# Altium PCB PCB_2021-06-03.pcbdoc
Units mil, origin at the board's own origin, x right, y up, seen from the top; angles counter-clockwise.
Board outline 3817.5 x 3390 mil, 2 copper layers (Top Layer, Bottom Layer); 39 components, 40 nets, 140 pads, 39 vias.
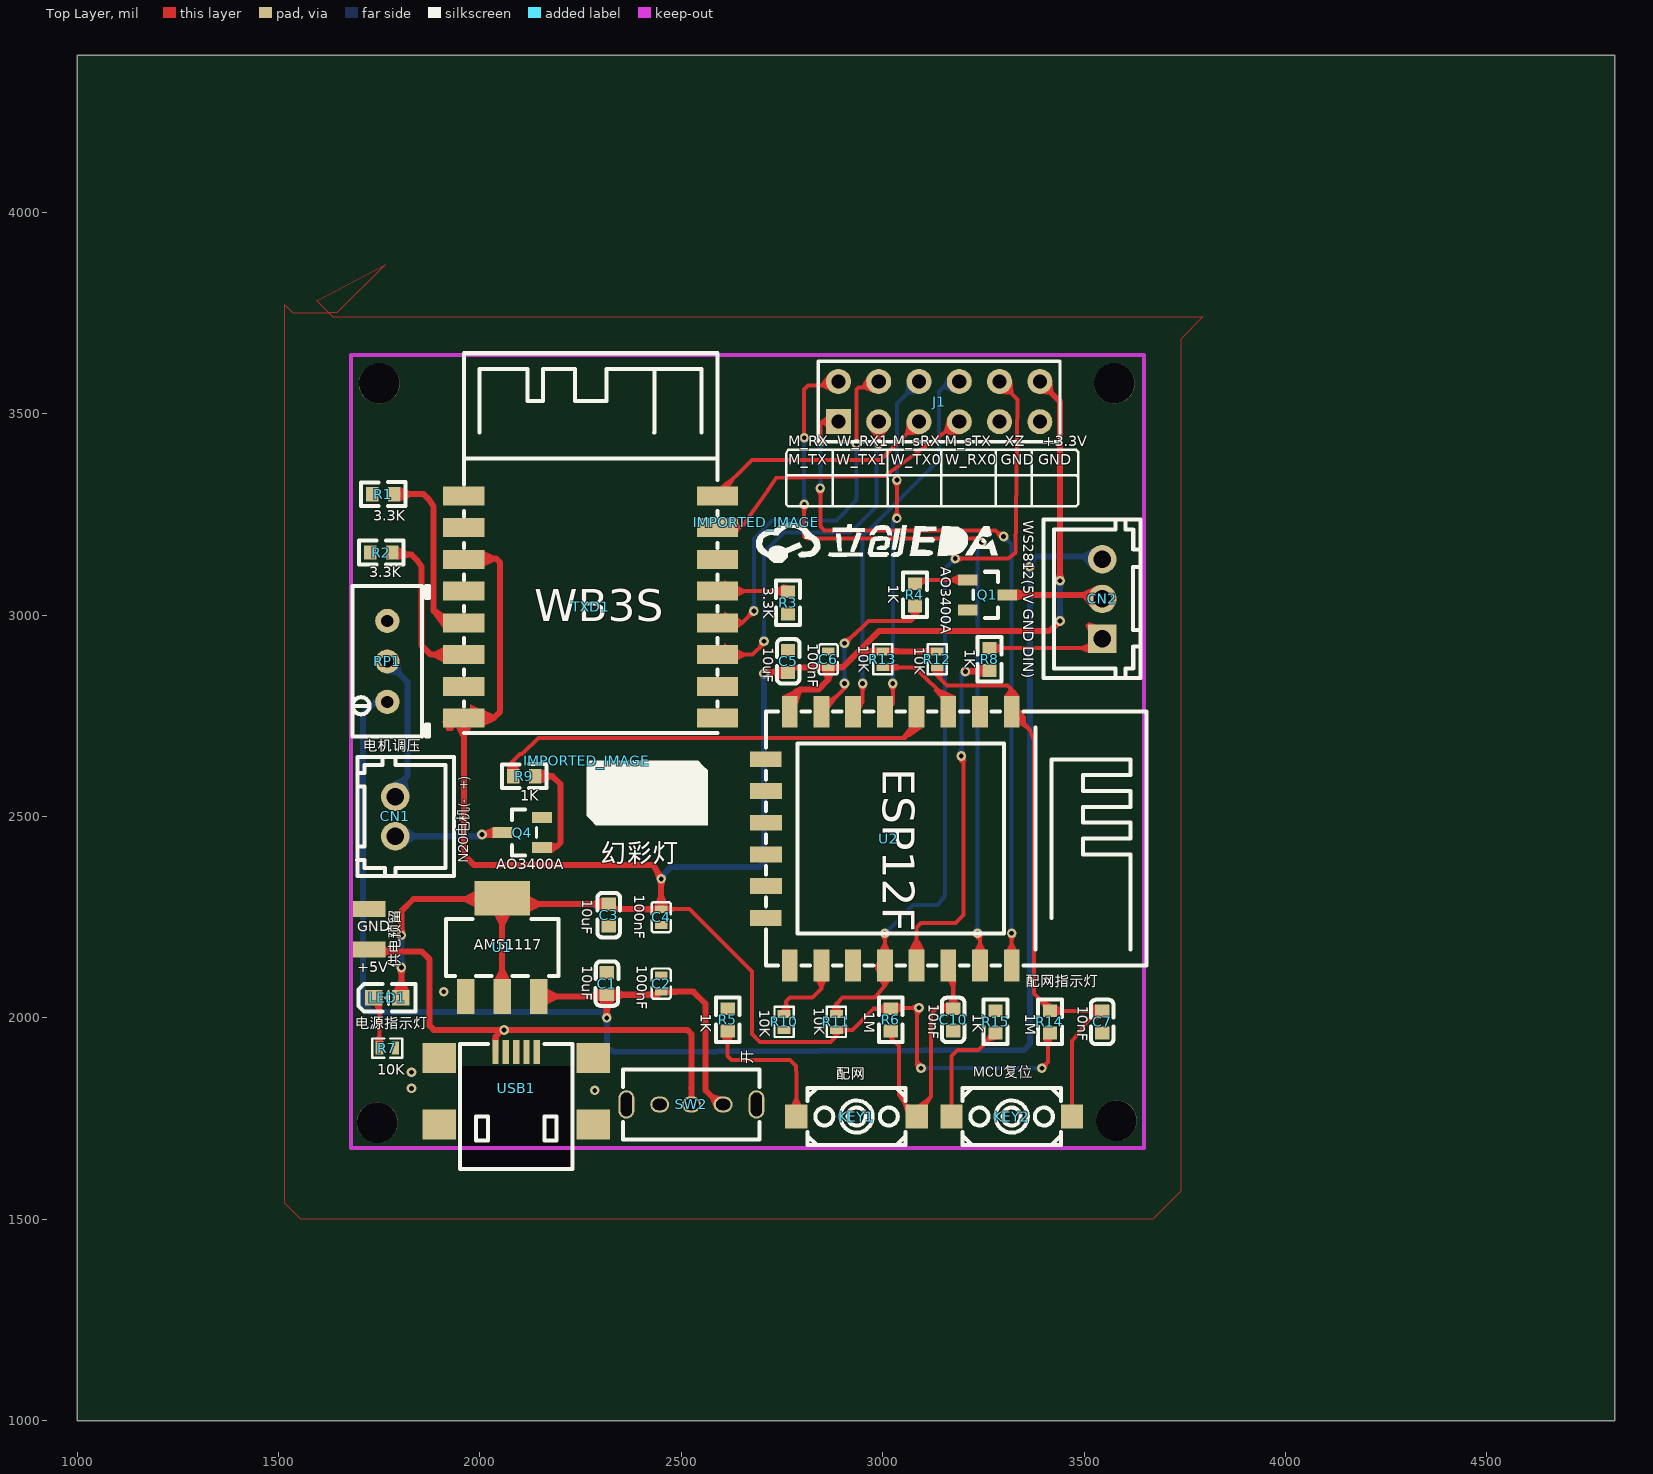
[diagram p0: Top Layer view]
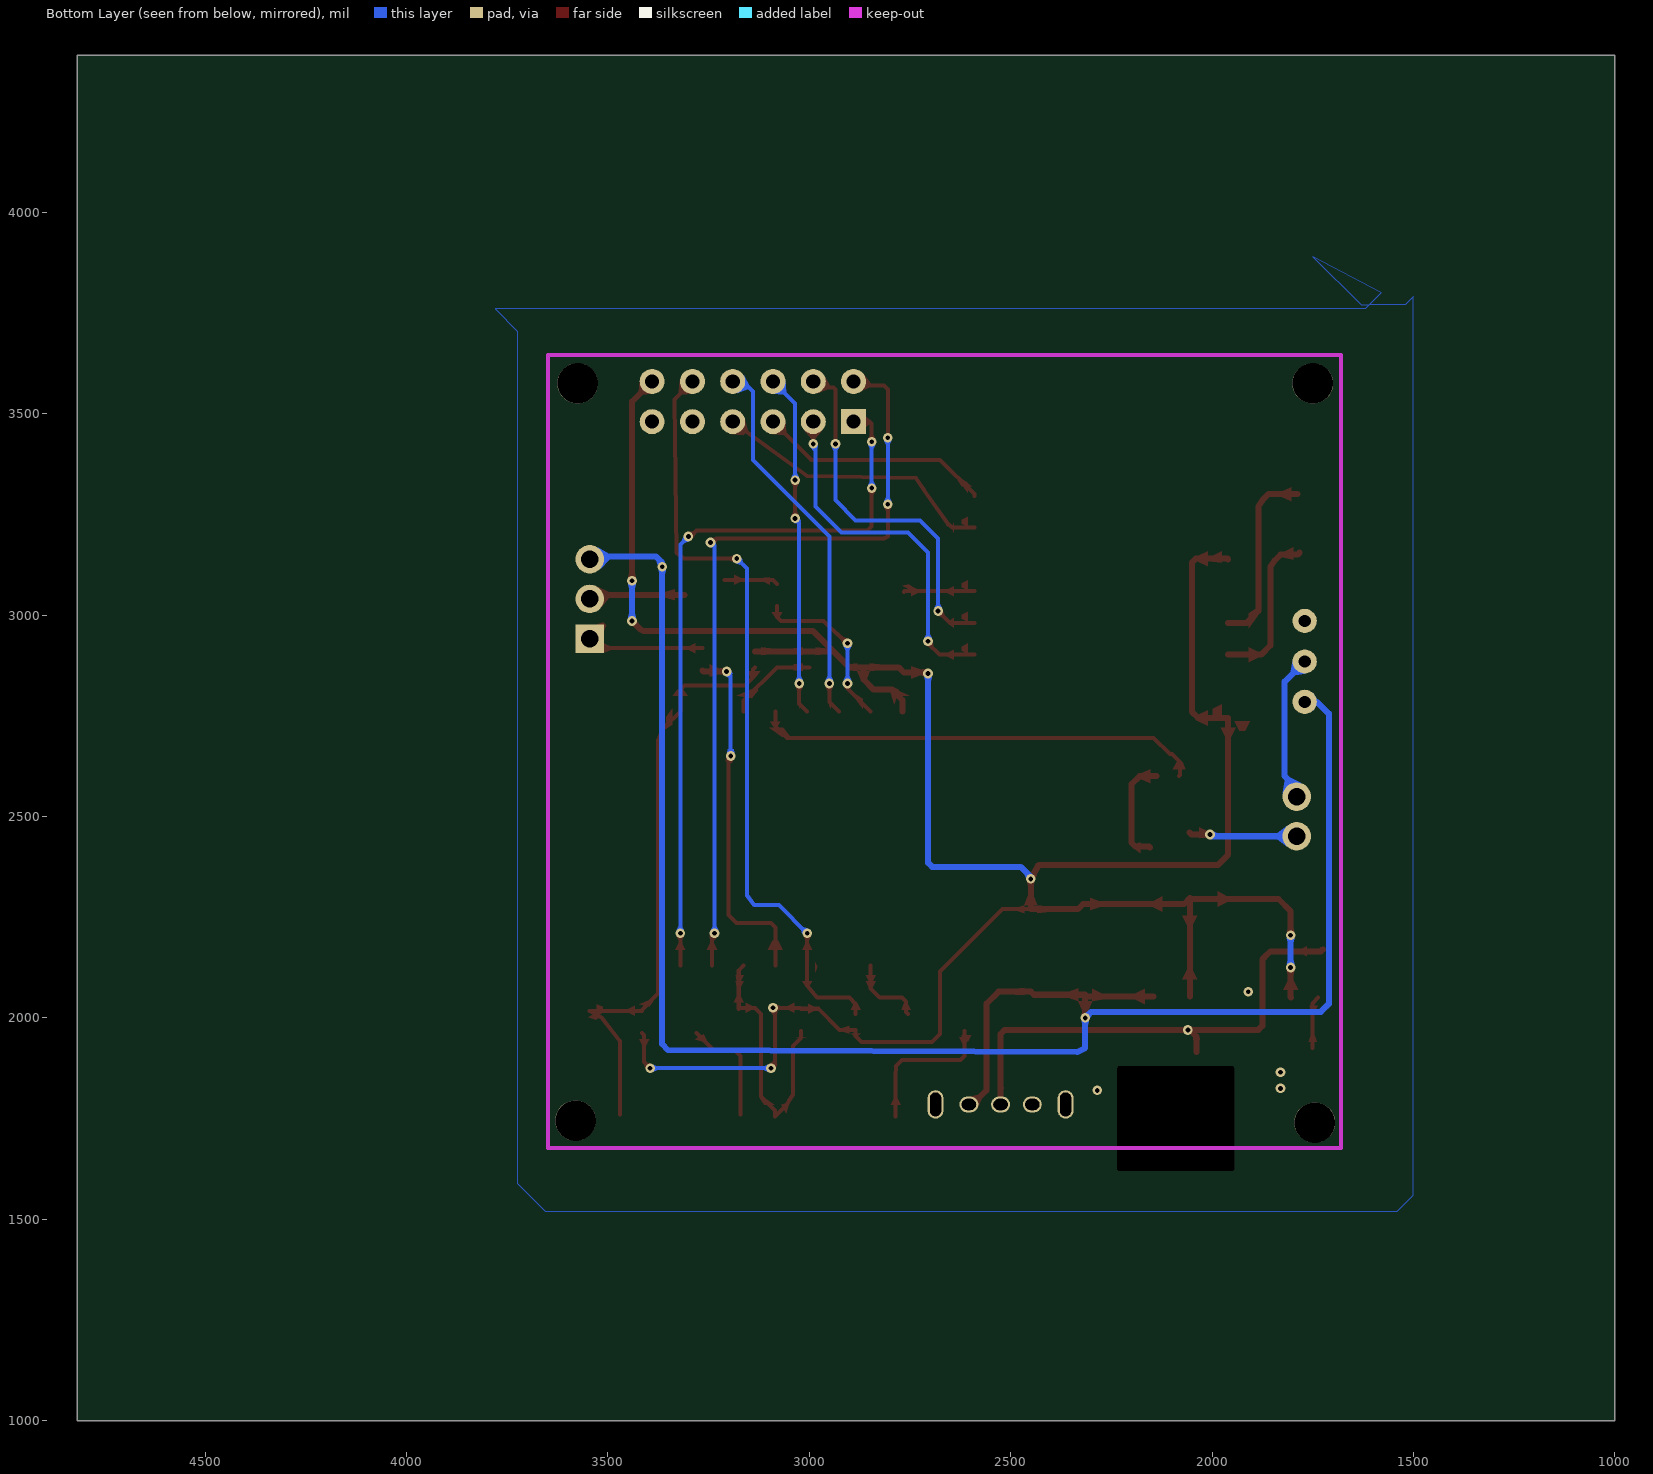
[diagram p1: Bottom Layer view, seen from below]

## Layer stack, top to bottom
Top Layer: signal copper (thickness not stored)
Dielectric: dielectric 12.6, FR-4, Dk 4.8
Bottom Layer: signal copper (thickness not stored)

## Board outline
4817.5,1000 1000,1000 1000,4390 4817.5,4390

## Components (designator, comment, footprint, x,y, rotation, side; value= is the part's Value field where it differs from the comment)
C1 "10uF" C0603 2315,2085 r270 top
C2 "100nF" C0402 2450,2085 r270 top
C3 "10uF" C0603 2320,2255 r90 top
C4 "100nF" C0402 2450,2250 r90 top
C5 "10uF" C0603 2765,2885 r270 top
C6 "100nF" C0402 2865,2890 r270 top
C7 "10nF" C0603 3545,1990 r90 top
C10 "10nF" C0603 3175,1995 r90 top
CN1 "HX25003-2A" CONN-TH_2P-P2.50_HX25003-2A 1790,2500 r90 top
CN2 "HX25003-3A" CONN-TH_3P-P2.50_HX25003-3A 3545,3040 r270 top
IMPORTED_IMAGE "IMPORTED_IMAGE" IMPORTED_IMAGE 2265,2638.1 r0 top
IMPORTED_IMAGE "IMPORTED_IMAGE" IMPORTED_IMAGE 2685.34,3230 r0 top
J1 "HDR-M-2.54_2x6" HDR-M-2.54_2X6 3140,3530 r0 top
KEY1 "配网" KEY-SMD_2P-L6.2-W3.6-LS8.0 2935,1755 r0 top
KEY2 "MCU复位" KEY-SMD_2P-L6.2-W3.6-LS8.0 3320,1755 r0 top
LED1 "电源指示灯" LED0603-R-RD 1770,2050 r0 top
Q1 "AO3400A" SOT-23-3_L2.9-W1.3-P1.90-LS2.4-BR 3260,3050 r180 top
Q4 "AO3400A" SOT-23-3_L2.9-W1.3-P1.90-LS2.4-BR 2105,2460 r0 top
R1 "3.3K" R0603 1760,3300 r0 top
R2 "3.3K" R0603 1755,3155 r0 top
R3 "3.3K" R0603 2765,3030 r90 top
R4 "1K" R0603 3080,3050 r90 top
R5 "1K" R0603 2615,1995 r270 top
R6 "1M" R0603 3020,1995 r90 top
R7 "10K" R0402 1770,1925 r180 top
R8 "1K" R0603 3265,2890 r90 top
R9 "1K" R0603 2110,2600 r0 top
R10 "10K" R0402 2755,1990 r270 top
R11 "10K" R0402 2885,1990 r270 top
R12 "10K" R0402 3135,2890 r270 top
R13 "10K" R0402 3000,2890 r270 top
R14 "1M" R0603 3415,1990 r270 top
R15 "1K" R0603 3280,1990 r270 top
RP1 "R_3296W_US" RES-ADJ-TH_3296W 1770,2885 r180 top
SW2 "开" SW-TH_SK-12D02VG3 2525,1785 r0 top
TXD1 "WB3S" WB3S 2275,3020 r0 top
U1 "AMS1117" SOT-223-3_L6.5-W3.4-P2.30-LS7.0-BR 2055,2175 r270 top
U2 "ESP-12F(ESP8266MOD)" WIFIM-SMD_ESP-12F-ESP8266MOD 3015,2445 r270 top
USB1 "U253-051T-4BH87-F-2" MICRO-USB-SMD_U253-051T-4BH87-S-2 2090,1825 r0 top

## Footprints (in the part's own frame and the unit in brackets; to place one, negate y for a bottom-side part, rotate by r counter-clockwise, add the part's x,y. Pads: shape width x height; smd on the part's side, far side on the other; paste and mask are expansions set on the pad)
C0402 [mm]
  rect 0.5x0.8 smd: 1(-0.5,0) 2(0.5,0)
  silkscreen extent -0.95,-0.6 0.95,0.6
C0603 [mm]
  rect 0.8x0.9 smd: 1(-0.7,0) 2(0.7,0)
  silkscreen extent -1.4,-0.7 1.4,0.72
CONN-TH_2P-P2.50_HX25003-2A [mm]
  round 1.8 hole 1.1: 1(-1.25,0) 2(1.25,0)
  silkscreen extent -3.75,-3.7 3.75,2.41
CONN-TH_3P-P2.50_HX25003-3A [mm]
  rect 1.8x1.8 hole 1.1: 1(2.5,0)
  round 1.8 hole 1.1: 2(0,0) 3(-2.5,0)
  silkscreen extent -5,-3.7 5,2.4
HDR-M-2.54_2X6 [mil]
  rect 62x62 hole 35: 1(-250,-50)
  round 62 hole 35: 2(-250,50) 3(-150,-50) 4(-150,50) 5(-50,-50) 6(-50,50) 7(50,-50) 8(50,50) 9(150,-50) 10(150,50) 11(250,-50) 12(250,50)
  silkscreen extent -300,-100 300,100
IMPORTED_IMAGE [mil]
  silkscreen extent 0,-160 300,0
KEY-SMD_2P-L6.2-W3.6-LS8.0 [mm]
  rect 1.4x1.5 smd: 1(-3.8,0) 2(3.8,0)
  silkscreen extent -3.1,-1.8 3.1,1.8
LED0603-R-RD [mil]
  rect 43x39 smd: 1(33.5,0) 2(-33.5,0)
  silkscreen extent -72,-34 70,34
MICRO-USB-SMD_U253-051T-4BH87-S-2 [mm]
  rect 0.4x1.524 smd: 1(-1.3,2.288) 2(-0.65,2.288) 3(0,2.288) 4(0.65,2.288) 5(1.3,2.288)
  rect 2.1x1.9 smd: 6(4.85,1.913) 7(4.85,-2.288) 8(-4.85,-2.288) 9(-4.85,1.913)
  Multi-Layer board cut-out: -3.683,-5.08 -3.683,1.27 -3.673,1.319 -3.646,1.36 -3.605,1.387 -3.556,1.397 -3.556,1.397 3.556,1.397 3.605,1.387 3.646,1.36 3.673,1.319 3.683,1.27 3.683,1.27 3.683,-5.08 3.673,-5.129 3.646,-5.17 3.605,-5.197 3.556,-5.207 3.556,-5.207 -3.556,-5.207 -3.605,-5.197 -3.646,-5.17 -3.673,-5.129 -3.683,-5.08 -3.683,-5.08
  silkscreen extent -3.56,-5.08 3.56,2.8
R0402 [mm]
  rect 0.5x0.8 smd: 1(-0.5,0) 2(0.5,0)
  silkscreen extent -0.95,-0.6 0.95,0.6
R0603 [mm]
  rect 0.8x0.9 smd: 1(-0.7,0) 2(0.7,0)
  silkscreen extent -1.4,-0.75 1.4,0.76
RES-ADJ-TH_3296W [mil]
  round 60 hole 30: 1(0,100.39) 2(0,0.39) 3(0,-100.39)
  silkscreen extent -104,-187 87,187
SOT-23-3_L2.9-W1.3-P1.90-LS2.4-BR [mm]
  rect 1.25x0.7 smd: 1(1.25,-0.95) 2(1.25,0.95) 3(-1.25,0)
  silkscreen extent -0.65,-1.46 0.9,1.46
SOT-223-3_L6.5-W3.4-P2.30-LS7.0-BR [mm]
  rect 2.2x1.1 smd: 1(3.099,-2.3) 2(3.099,0) 3(3.099,2.3)
  rect 2.2x3.5 smd: 4(-3.099,0)
  silkscreen extent -1.8,-3.55 1.8,3.55
SW-TH_SK-12D02VG3 [mm]
  oval 1.2x1 hole 0.7 slot 0.9 at 0 deg: 1(-2,0) 2(0,0) 3(2,0)
  oval 1x1.8 hole 0.7 slot 1.5 at 90 deg: 4(4.1,0) 5(-4.1,0)
  silkscreen extent -4.3,-2.2 4.3,2.2
WB3S [mm]
  rect 2.6x1.2 smd: 1(-8,7) 2(-8,5) 3(-8,3) 4(-8,1) 5(-8,-1) 6(-8,-3) 7(-8,-5) 8(-8,-7) 9(8,-7) 10(8,-5) 11(8,-3) 12(8,-1) 13(8,1) 14(8,3) 15(8,5) 16(8,7)
  silkscreen extent -8,-7.95 8,16
WIFIM-SMD_ESP-12F-ESP8266MOD [mm]
  rect 2x1 smd: 1(-8.002,7.751) 2(-8.002,5.751) 3(-8.002,3.751) 4(-8.002,1.751) 5(-8.002,-0.25) 6(-8.002,-2.25) 7(-8.002,-4.249) 8(-8.001,-6.249) 9(7.999,-6.249) 10(8,-4.249) 11(8.002,-2.25) 12(8.001,-0.25) 13(8,1.751) 14(8.001,3.751) 15(8,5.751) 16(8.001,7.751)
  rect 1x2 smd: 17(-5,-7.751) 18(-3.002,-7.749) 19(-1.003,-7.749) 20(0.998,-7.749) 21(2.997,-7.749) 22(4.997,-7.75)
  silkscreen extent -8,-7.75 8,16.25

## Free pads (board coordinates)
  rect 80x40 smd: 1(1725,2170) 2(1725,2270)
  round 100.39 hole 100.39 unplated: ""(1745,1740) ""(1750,3575) ""(3575,3575) ""(3580,1745)

## Via types
v1: diameter 24, hole 12, Top Layer to Bottom Layer, 39 vias

## Nets (pads, with @x,y where several pads share a name; then routed paths per layer and width w, separated by ;. In a path a pad name is that pad's centre, name@x,y a point inside that pad or via, vN(x,y) a via of type N, cw(c..) or ccw(c..) an arc to the next point about the centre after c; other vN are vias at no path point)
+3.3V: C3.2 C4.2 C5.2 C6.2 J1.12 LED1.1 R6.2 R11.2 R12.1 R13.1 R14.2 TXD1.3 TXD1.8 U1.2 U1.4 U2.8 | length 6612
  Top Layer w10: C4.2 2520,2270 2675,2115 2675,1960 2695,1940 2870,1940 2885,1955 R11.2 2925.3,1970.3 2977.6,2022.6 R6.2 3022.4,2025 v1(3090,2025) 3085,2025 3085,1885 v1(3095,1875) ; v1(3395,1875) 3410,1890 3410,1957.44 R14.2
  Top Layer w15: LED1.1 1805,2051.5 v1(1805,2125) ; v1(1805,2205) 1805,2265 1835,2295 2053,2295 U1.4 ; TXD1.3 1961.9,3140 2040,3140 2050,3130 2050,2760 2034.4,2744.4 TXD1.8 1960,2405 1985,2380 2430,2380 v1(2450,2345) C4.2 2332.9,2269.7 C3.2 2069.4,2282.6 U1.4 ; U1.2 U1.4 ; v1(2705,2855) 2707.4,2857.4 C5.2 2777.9,2870.3 C6.2 ; U2.8 2769,2789 2795,2815 2840,2815 2865,2840 C6.2 ; R12.1 R13.1 2940,2909.7 ; J1.12 3440,3530 v1(3440,3085) ; v1(3440,2985) 3425,2970 3420,2965 3410,2960 2990.3,2960 2940,2909.7 ; C6.2 2900.3,2870.3 2940,2909.7
  Bottom Layer w10: v1(3095,1875) v1(3395,1875)
  Bottom Layer w15: v1(1805,2125) v1(1805,2205) ; v1(2450,2345) 2450,2350 2475,2375 2695,2375 2705,2385 v1(2705,2855) ; v1(3440,2985) v1(3440,3085)
+5V: C1.2 C2.2 CN2.3 RP1.1 SW2.3 U1.3 | length 4692.3
  Top Layer w15: U1.3@2145.5,2053 2310.6,2053 C1.2 ; v1(2315,2000) C1.2 ; SW2.3 2595,1785 2560,1820 2560,2035 2529.7,2065.3 C2.2 2442.1,2057.4 C1.2
  Bottom Layer w15: RP1.1 1739.6,2784.6 1710,2755 1710,2040 1710,2035 1715,2030 1730,2015 2300,2015 v1(2315,2000) 2315,1925 2335,1915 3350.9,1920 3365,1935 v1(3365,3120) 3365,3130 3380,3145 3538.43,3145 CN2.3
DIN: R8.1 U2.13 | length 895.1
  Top Layer w10: U2.13 3083.9,2223.9 3095,2235 3180,2235 3200,2255 3200,2645 v1(3195,2650)
  Top Layer w15: v1(3205,2860) 3262.6,2860 R8.1
  Bottom Layer w10: v1(3195,2650) 3195,2850 v1(3205,2860)
GND: C1.1 C2.1 C3.1 C4.1 C5.1 C6.1 C7.1 C10.1 J1.9 J1.11 pad.2 Q1.2 Q4.2 R1.1 R2.1 R3.1 R5.1 R7.1 R10.2 R15.1 SW2.4 SW2.5 TXD1.9 U1.1 U2.9 USB1.5 USB1.6 USB1.7 USB1.8 USB1.9
  other v1: 2285,1820 1830,1825 1830,1865 1910,2065
KEY2_1: KEY2.1 R15.2 | length 278.5
  Top Layer w10: KEY2.1@3170.4,1760 3170.4,1905 3185,1920 3237.6,1920 R15.2
LED: R4.1 U2.7 | length 421.7
  Top Layer w10: U2.7 2905,2817.3 v1(2905,2830) ; v1(2905,2930) 2950,2970 2955,2975 2965,2985 3070,2985 3080,2995 R4.1
  Bottom Layer w10: v1(2905,2830) v1(2905,2930)
M_RST: C7.2 KEY2.2 R12.2 R14.1 U2.1 | length 1474.8
  Top Layer w10: R12.2 3140,2865.3 3140,2845 3160,2825 3310,2825 3320.1,2814.9 U2.1 3360,2720.2 3365,2715 3375,2690 3375,2060 3415,2020 R14.1 C7.2 ; KEY2.2@3469.6,1760 3469.6,1942.2 3515,2000 C7.2
M_RX: J1.2 U2.15 | length 1960.4
  Top Layer w10: v1(2805,3275) 2805,3195 2815,3190 3230,3190 3240,3180 v1(3245,3180) ; v1(2805,3440) 2805,3560 2815,3570 2880,3570 J1.2 ; v1(3235,2210) 3241.4,2203.6 U2.15
  Bottom Layer w10: v1(2805,3275) v1(2805,3440) ; v1(3235,2210) 3235,3170 v1(3245,3180)
M_SRX: J1.6 U2.5 | length 855.1
  Top Layer w10: U2.5 3025,2779.8 v1(3025,2830) ; v1(3035,3240) v1(3035,3335)
  Bottom Layer w10: v1(3025,2830) 3025,3230 v1(3035,3240) ; v1(3035,3335) 3035,3525 J1.6
M_STX: J1.8 U2.6 | length 943.8
  Top Layer w10: U2.6 2950,2783.6 v1(2950,2830)
  Bottom Layer w10: v1(2950,2830) 2950,3195 3140,3385 3140,3555 3165,3580 J1.8
M_TX: J1.1 U2.16 | length 1840.7
  Top Layer w10: v1(2845,3315) 2845,3220 2855,3210 2860,3210 3280,3210 3295,3195 v1(3300,3195) ; v1(2845,3430) 2845,3475 2850,3480 J1.1 ; v1(3320,2210) U2.16
  Bottom Layer w10: v1(2845,3315) v1(2845,3430) ; v1(3300,3195) 3320,3175 v1(3320,2210)
N20: R9.1 U2.4 | length 1112.8
  Top Layer w10: R9.1 2080,2602.4 2080,2635 2100,2655 2105,2655 2145,2695 3055,2695 3083.9,2723.9 U2.4
PW: C10.2 KEY1.2 R6.1 U2.14 | length 681.5
  Top Layer w10: R6.1 3020,1950 3040,1930 3040,1810 3050,1795 3055,1784.6 KEY1.2 3084.6,1769.6 3120,1805 3120,2010 3135,2025 3172.6,2025 C10.2 3175,2117.7 U2.14
Q1_3: CN2.2 Q1.3 | length 239.9
  Top Layer w15: Q1.3 3535,3050 CN2.2
Q4_1: Q4.1 R9.2 | length 266.6
  Top Layer w15: R9.2 2180,2600 2200,2580 2200,2435 2190,2425 2156.6,2425 Q4.1
Q4_3: CN1.1 Q4.3 | length 269.6
  Top Layer w15: v1(2005,2455) 2050.8,2455 Q4.3
  Bottom Layer w15: CN1.1 2000.79,2450.79 v1(2005,2455)
R4_2: Q1.1 R4.2 | length 134.9
  Top Layer w10: R4.2 3089.8,3087.4 Q1.1
R5_2: KEY1.1 R5.2 | length 367.8
  Top Layer w10: R5.2 2615,1905 2625,1895 2770,1895 2785,1880 2785,1875 2785.4,1859.6 KEY1.1
R7_2: LED1.2 R7.2 | length 130.7
  Top Layer w10: LED1.2 1750.3,2036.2 R7.2
R8_2: CN2.1 R8.2 | length 289.9
  Top Layer w10: R8.2 3521,2917.6 CN2.1
RP1_2: CN1.2 RP1.2 | length 368.5
  Bottom Layer w15: RP1.2 1820,2834.61 1820,2600 1790,2570 CN1.2
S$68: 
S$2701: 
S$2703: 
S$2705: 
S$2707: 
S$2709: 
S$2711: 
S$2713: 
TXD1_5: R1.2 TXD1.5 | length 458.8
  Top Layer w15: R1.2 1860,3300 1875,3285 1885,3270 1885,3010 1914.4,2980.6 TXD1.5
TXD1_6: R2.2 TXD1.6 | length 398.3
  Top Layer w15: R2.2 1787.6,3150 1830,3150 1845,3135 1855,3120 1855,2925 1878.1,2901.9 TXD1.6
TXD1_13: R3.2 TXD1.13 | length 175.7
  Top Layer w10: TXD1.13 2763.2,3059.4 R3.2
U2_3: R13.2 U2.3 | length 224.3
  Top Layer w10: R13.2 3080,2870 3162.7,2787.3 U2.3
U2_10: R10.1 U2.10 | length 190.9
  Top Layer w10: R10.1 2760,2014.7 2760,2040 2770,2050 2825,2050 2847.7,2072.7 U2.10
USB1_1: pad.1 SW2.2 USB1.1 | length 1225.2
  Top Layer w15: pad.1 1730,2165 1855,2165 1870,2150 1875,2145 1875,2135 1875,1980 1885,1970 v1(2060,1970) ; USB1.1 2038.8,1953.8 2055,1970 2515,1970 2525,1960 SW2.2
W_RX0: J1.7 TXD1.15 | length 706.7
  Top Layer w10: TXD1.15@2590,3216.8 2643.2,3216.8 2655,3225 2715,3310 2735,3340 3005,3345 J1.7
W_RX1: J1.4 TXD1.12 | length 914.8
  Top Layer w10: TXD1.12 2650.6,2980.6 v1(2680,3010) ; v1(2935,3425) 2935,3560 2940,3565 2975,3565 J1.4
  Bottom Layer w10: v1(2680,3010) 2680,3190 2725,3235 2885,3235 2935,3285 v1(2935,3425)
W_TX0: J1.5 TXD1.16 | length 579
  Top Layer w10: TXD1.16 2590,3300 2675,3385 2995,3385 J1.5
W_TX1: J1.3 TXD1.11 | length 891.4
  Top Layer w10: TXD1.11 2676.8,2901.9 2705,2929.8 v1(2705,2935) ; v1(2990,3425) J1.3
  Bottom Layer w10: v1(2705,2935) 2705,3155 2755,3205 2920,3205 2985,3270 2985,3420 v1(2990,3425)
XZ: J1.10 R11.1 U2.12 | length 1931.2
  Top Layer w10: R11.1 2885,2035 2900,2050 2980,2050 3005,2080 U2.12 v1(3005,2210) ; v1(3180,3140) 3310,3140 3330,3155 3335,3535 J1.10
  Bottom Layer w10: v1(3005,2210) 3075,2280 3136.5,2280 3155,2305 3155,3115 v1(3180,3140)
pads on no net: RP1.3 SW2.1 TXD1.1 TXD1.2 TXD1.4 TXD1.7 TXD1.10 TXD1.14 U2.2 U2.11 U2.17 U2.18 U2.19 U2.20 U2.21 U2.22 USB1.2 USB1.3 USB1.4

## Polygon pours and split planes (outlines as drawn)
GND on Bottom Layer (solid): 1500,1560 1500,3790 1520,3770 1610,3770 1580,3800 1750,3890 1630,3770 1610,3770 1620,3760 3780,3760 3725,3705 3725,1590 3655,1520 1540,1520 1500,1560
GND on Top Layer (solid): 1515,1540 1515,3770 1535,3750 1625,3750 1595,3780 1765,3870 1645,3750 1625,3750 1635,3740 3795,3740 3740,3685 3740,1570 3670,1500 1555,1500 1515,1540

## Other copper
Top Layer:
  pour cut-out: 1935,3660 1935,3375 2615,3375 2615,3660
  pour cut-out: 1940,3660 1940,3375 2620,3375 2620,3660
  pour cut-out: 3379.44,2760.02 3379.44,2120.02 3654.44,2120.02 3654.44,2760.02
  region net USB1_1: 2030.94,1945.06 2046.69,1945.06 2046.3,1953.8 2031.3,1953.8
  region net M_RST: 3339.83,2752.83 3339.83,2727.83 3354.83,2718.26 3354.83,2732.4
  region net M_RST: 3397.29,2027.66 3421.64,2033.31 3398.69,2043.38 3387.21,2040.72
  region net M_RST: 3397.29,2027.66 3421.64,2033.31 3398.69,2043.38 3387.21,2040.72
  region net M_RST: 3339.8,2767.86 3339.8,2742.86 3354.8,2733.29 3354.8,2747.43
  region net M_RST: 3527.29,2005.06 3527.29,2030.06 3512.29,2022.56 3512.29,2012.56
  region net M_RST: 3432.71,2030.06 3432.71,2005.06 3447.71,2012.56 3447.71,2022.56
  region net +3.3V: 3422.5,1946.69 3397.5,1946.69 3405,1931.69 3415,1931.69
  region net +3.3V: 3406.98,1874.25 3394.25,1886.98 3403.02,1890.09 3410.09,1883.02
  region net M_RST: 3339.8,2752.85 3339.8,2727.85 3354.8,2718.32 3354.8,2732.45
  region net M_RST: 3527.29,2010.06 3527.29,2033.31 3512.29,2027.56 3512.29,2017.56
  region net +3.3V: 3406.98,1874.25 3394.25,1886.98 3403.02,1890.09 3410.09,1883.02
  region net R5_2: 2627.5,1951.69 2602.5,1951.69 2610,1936.69 2620,1936.69
  region net R5_2: 2772.9,1784.53 2797.9,1784.53 2790.4,1799.53 2780.4,1799.53
  region net R5_2: 2622.5,1956.7 2597.5,1956.7 2605,1941.7 2615,1941.7
  region net R5_2: 2772.9,1784.53 2797.9,1784.53 2790.4,1799.53 2780.4,1799.53
  region net M_RST: 3150.75,2860.47 3121.25,2860.47 3132.5,2845 3147.5,2845
  region net M_RST: 3301.39,2799.39 3338.89,2799.39 3327.64,2814.86 3312.64,2814.86
  region net U2_3: 3015.75,2880.16 3015.75,2860.47 3038.25,2862.67 3038.25,2877.67
  region net U2_3: 3142.98,2793.35 3179.99,2799.39 3144.25,2816.35 3126.01,2813.38
  region net N20: 2066.69,2617.72 2098.19,2617.72 2087.5,2635 2072.5,2635
  region net N20: 3099.4,2720.65 3064.24,2720.65 3047.54,2698.15 3068.76,2698.15
  region net M_SRX: 3016,2822.06 3034,2822.06 3030,2813.66 3020,2813.66
  region net M_SRX: 3021.46,2783.38 3024.87,2773.17 3024.87,2792.21 3025,2772.77 3024.87,2773.17 3024.87,2767.21 3021.46,2783.38
  region net M_STX: 2941,2822.06 2959,2822.06 2955,2813.66 2945,2813.66
  region net M_STX: 2946.13,2792.21 2946.13,2767.21 2950,2776.51 2946.46,2787.12
  region net LED: 2896,2822.06 2914,2822.06 2910,2817.32 2900,2817.32
  region net LED: 2867.39,2792.21 2867.39,2767.21 2882.39,2787.64 2882.39,2801.78
  region net +3.3V: 2880.75,2860.47 2849.25,2860.47 2857.5,2840 2872.5,2840
  region net +3.3V: 2751.23,2799.36 2788.65,2796.88 2800.3,2809.7 2785.05,2815.66
  region net U2_10: 2747.5,2019.53 2770.75,2019.53 2765,2034.53 2755,2034.53
  region net U2_10: 2860.2,2090.66 2835.2,2090.66 2842.7,2075.66 2852.7,2075.66
  region net XZ: 3017.54,2090.64 2992.54,2090.64 3000,2080.02 3010,2080
  region net XZ: 2872.5,2019.53 2897.5,2019.53 2890,2034.53 2880,2034.53
  region net XZ: 2996,2202.06 3014,2202.06 3010,2193.66 3000,2193.66
  region net XZ: 2992.5,2169.38 3017.5,2169.38 3010,2184.38 3000,2184.38
  region net DIN: 3188.86,2639.69 3206,2645.2 3207.5,2636.86 3192.5,2632.04
  region net DIN: 3065.17,2169.41 3102.67,2169.41 3091.42,2191.91 3076.42,2191.91
  region net PW: 3162.5,2038.31 3187.5,2038.31 3180,2053.31 3170,2053.31
  region net PW: 3182.35,2090.64 3162.5,2090.64 3170,2075.64 3180,2075.64
  region net M_RX: 3228.9,2169.39 3253.9,2169.39 3246.4,2184.39 3236.4,2184.39
  region net M_RX: 3229.83,2199.17 3246.39,2206.22 3246.4,2197.09 3236.4,2192.84
  region net M_TX: 3307.64,2169.38 3332.64,2169.38 3325.14,2184.38 3315.14,2184.38
  region net M_TX: 3329.07,2202.14 3311.07,2201.99 3315.14,2193.62 3325.14,2193.71
  region net M_RST: 3307.64,2814.4 3332.64,2814.4 3325.14,2814.86 3315.14,2814.86
  region net M_RST: 3150.7,2860.5 3127.5,2860.5 3135,2845.5 3145,2845.5
  region net U2_3: 3143,2794.5 3143,2814.4 3128,2829.07 3128,2814.93
  region net U2_3: 3015.75,2880.16 3015.75,2860.47 3030.75,2865.2 3030.75,2875.2
  region net N20: 3096.42,2735.6 3071.42,2735.6 3078.92,2723.92 3088.92,2723.92
  region net N20: 2067.5,2617.72 2092.5,2617.72 2085,2632.72 2075,2632.72
  region net M_SRX: 3016,2822.06 3034,2822.06 3030,2813.66 3020,2813.66
  region net M_SRX: 3021.46,2798.37 3024.9,2788.06 3024.9,2807.24 3025,2787.77 3024.9,2788.06 3024.9,2782.24 3021.46,2798.37
  region net M_STX: 2941,2822.06 2959,2822.06 2955,2813.66 2945,2813.66
  region net M_STX: 2946.1,2807.18 2946.1,2782.18 2950,2791.51 2946.46,2802.11
  region net +3.3V: 2880.75,2860.47 2849.25,2860.47 2857.5,2840 2872.5,2840
  region net +3.3V: 2778.06,2814.4 2788.6,2778.41 2797.4,2806.8 2789.7,2820.3
  region net U2_10: 2860.2,2105.7 2835.2,2105.7 2842.7,2090.7 2852.7,2090.7
  region net U2_10: 2747.5,2019.53 2770.75,2019.53 2765,2034.53 2755,2034.53
  region net XZ: 2985.5,2112.83 2985.5,2137.83 2980,2126.9 2983.54,2116.29
  region net XZ: 2872.5,2019.53 2897.5,2019.53 2890,2034.53 2880,2034.53
  region net XZ: 3014.09,2202.16 2996.09,2201.96 3000.18,2193.61 3010.18,2193.72
  region net DIN: 3188.86,2639.69 3206,2645.2 3205,2636.05 3195,2632.84
  region net PW: 3182.3,2105.6 3162.5,2105.6 3170,2090.6 3180,2090.6
  region net PW: 3162.5,2038.31 3187.5,2038.31 3180,2053.31 3170,2053.31
  region net M_RX: 3229.83,2199.17 3246.39,2206.22 3246.4,2197.1 3236.4,2192.84
  region net M_TX: 3329.07,2202.14 3311.07,2201.99 3315.14,2193.62 3325.14,2193.71
  region net W_TX0: 3059.06,3481.94 3091.94,3449.06 3063.69,3446.62 3056.62,3453.69
  region net W_TX0: 2596.71,3319.21 2621.71,3319.21 2631.28,3334.21 2617.14,3334.21
  region net W_TX0: 2606.1,3328.6 2606.1,3303.6 2621.1,3324.03 2621.1,3338.17
  region net W_TX0: 3059.06,3481.94 3091.94,3449.06 3063.69,3446.62 3056.62,3453.69
  region net W_RX0: 3159.06,3481.94 3191.94,3449.06 3163.69,3446.62 3156.62,3453.69
  region net W_RX0: 2641.14,3229.35 2641.14,3204.35 2643.15,3211.85 2643.15,3221.85
  region net W_RX0: 2606.1,3244.35 2606.1,3219.35 2621.1,3226.85 2621.1,3236.85
  region net W_RX0: 3187.14,3449.13 3159.73,3486.69 3152.96,3459.16 3158.85,3451.08
  region net TXD1_13: 2641.14,3071.87 2641.14,3046.87 2656.14,3054.37 2656.14,3064.37
  region net TXD1_13: 2747.3,3046.87 2747.3,3071.87 2732.3,3064.37 2732.3,3054.37
  region net TXD1_13: 2606.1,3086.87 2606.1,3061.87 2621.1,3069.37 2621.1,3079.37
  region net TXD1_13: 2747.3,3060.99 2769.06,3073.3 2752.71,3076.92 2744.66,3070.83
  region net W_RX1: 2641.14,2993.13 2641.14,2968.13 2650.62,2975.63 2650.62,2985.63
  region net W_RX1: 2680.75,2998.02 2668.02,3010.75 2664.91,3001.98 2671.98,2994.91
  region net W_RX1: 2606.1,3008.13 2606.1,2983.13 2621.1,2990.63 2621.1,3000.63
  region net W_RX1: 2680.75,2998.02 2668.02,3010.75 2664.91,3001.98 2671.98,2994.91
  region net W_TX1: 2693.15,2933.09 2708.38,2923.48 2700.62,2918.45 2691.94,2923.92
  region net W_TX1: 2641.14,2914.4 2641.14,2889.4 2656.14,2896.9 2656.14,2906.9
  region net W_TX1: 2606.1,2929.39 2606.1,2904.39 2621.1,2911.89 2621.1,2921.89
  region net W_TX1: 2693.16,2933.05 2708.41,2923.49 2700.67,2918.43 2691.98,2923.88
  region net +3.3V: 1978.75,2720.79 1941.25,2720.79 1952.5,2698.29 1967.5,2698.29
  region net +3.3V: 1943.79,2735.8 1906.29,2735.8 1917.54,2713.3 1932.54,2713.3
  region net +3.3V: 2438.25,2347.43 2453.88,2356.36 2448.41,2362.91 2435.38,2355.46
  region net TXD1_6: 1798.31,3168.75 1798.31,3137.28 1815,3142.5 1815,3157.5
  region net TXD1_6: 1908.86,2883.14 1908.86,2920.64 1886.36,2909.39 1886.36,2894.39
  region net TXD1_6: 1798.31,3168.75 1798.31,3137.28 1820.81,3142.5 1820.81,3157.5
  region net TXD1_5: 1803.31,3317.72 1803.31,3282.28 1825.81,3292.5 1825.81,3307.5
  region net TXD1_5: 1908.86,2967.39 1908.86,3004.25 1886.36,3019.25 1886.36,2998.04
  region net TXD1_5: 1803.31,3317.72 1803.31,3282.28 1825.81,3292.5 1825.81,3307.5
  region net +3.3V: 2011.22,3158.75 2011.22,3121.25 2033.72,3132.5 2033.72,3147.5
  region net +3.3V: 2011.22,2763.16 2011.22,2725.66 2033.72,2736.91 2033.72,2751.91
  region net +3.3V: 1976.2,3158.75 1976.2,3129.5 1998.7,3132.5 1998.7,3147.5
  region net +3.3V: 1976.2,2778.16 1976.2,2740.66 1998.7,2751.91 1998.7,2766.91
  region net +3.3V: 1976.2,3158.75 1976.2,3129.5 1998.7,3132.5 1998.7,3147.5
  region net +3.3V: 1976.2,2778.16 1976.2,2740.66 1998.7,2751.91 1998.7,2766.91
  region net DIN: 3212.94,2851 3212.94,2869 3221.34,2867.5 3221.34,2852.5
  region net DIN: 3247.29,2846.69 3247.29,2878.19 3224.79,2867.5 3224.79,2852.5
  region net R8_2: 3282.71,2930.06 3282.71,2905.06 3297.71,2912.56 3297.71,2922.56
  region net R8_2: 3509.57,2906.14 3509.57,2930.06 3494.57,2922.56 3494.57,2912.56
  region net R8_2: 3509.57,2959.34 3527.25,2977.01 3511.34,2982.31 3504.26,2975.24
  region net R7_2: 1758,2030.5 1737.82,2030.5 1745.32,2015.5 1755.32,2015.5
  region net R7_2: 1740.47,1940.75 1760.16,1940.75 1755.32,1955.75 1745.32,1955.75
  region net M_SRX: 3026,3247.94 3044,3247.94 3040,3256.34 3030,3256.34
  region net M_SRX: 3026,3327.06 3044,3327.06 3040,3318.66 3030,3318.66
  region net W_TX1: 3013.25,3459.5 2966.75,3459.5 2985,3437.8 2995,3437.8
  region net W_RX1: 2979.1,3550.98 2962.57,3594.44 2948.65,3570 2952.45,3560
  region net M_TX: 3298.14,3206.86 3288.47,3191.67 3283.47,3199.46 3288.97,3208.1
  region net M_TX: 2836,3307.06 2854,3307.06 2850,3298.66 2840,3298.66
  region net M_RX: 3243.14,3191.86 3233.47,3176.67 3228.47,3184.46 3233.97,3193.1
  region net M_RX: 2796,3267.06 2814,3267.06 2810,3258.66 2800,3258.66
  region net M_TX: 2836,3437.94 2854,3437.94 2850,3446.34 2840,3446.34
  region net M_TX: 2859,3467.5 2859,3492.5 2850,3485 2850,3475
  region net M_RX: 2875.59,3552.55 2864.57,3597.73 2847.78,3575 2850.22,3565
  region net XZ: 3187.94,3131 3187.94,3149 3196.34,3145 3196.34,3135
  region net XZ: 3288.06,3549.06 3320.94,3581.94 3323.38,3553.69 3316.31,3546.62
  region net LED: 3092.5,3006.69 3067.5,3006.69 3075,2995 3085,2995
  region net LED: 2916.98,2929.25 2904.25,2941.98 2913.02,2945.09 2920.09,2938.02
  region net +3.3V: 3440.75,2973.02 3428.02,2985.75 3423.14,2978.75 3433.75,2968.14
  region net +3.3V: 3431,3092.94 3449,3092.94 3447.5,3101.34 3432.5,3101.34
  region net +3.3V: 3388.06,3549.06 3420.94,3581.94 3423.38,3553.69 3416.31,3546.62
  region net R4_2: 3097.71,3093.31 3097.71,3074.9 3112.71,3082.4 3112.71,3092.4
  region net R4_2: 3186.2,3074.9 3186.2,3099.9 3171.2,3092.4 3171.2,3082.4
  region net Q4_1: 2153.31,2617.72 2153.31,2582.28 2175.81,2592.5 2175.81,2607.5
  region net Q4_1: 2178.81,2436.38 2178.81,2408.82 2190,2417.5 2190,2432.5
  region net +3.3V: 1796,2212.94 1814,2212.94 1812.5,2221.34 1797.5,2221.34
  region net +3.3V: 1986.1,2276.25 1986.1,2313.75 1963.6,2302.5 1963.6,2287.5
  region net +3.3V: 1786.25,2069.5 1823.75,2069.5 1812.5,2092 1797.5,2092
  region net +3.3V: 1796,2117.06 1814,2117.06 1812.5,2108.66 1797.5,2108.66
  region net USB1_1: 2052.06,1961 2052.06,1979 2043.66,1975 2043.66,1965
  region net USB1_1: 1765,2177.5 1765,2152.5 1780,2160 1780,2170
  region net +3.3V: 3097.26,1886.79 3083.02,1875.77 3080,1884.05 3090,1891.79
  region net +3.3V: 3096.14,2014.69 3079,2020.2 3080,2011.05 3090,2007.84
  region net PW: 3087.03,1784.53 3112.03,1784.53 3121.6,1799.53 3107.46,1799.53
  region net PW: 3157.29,2012.5 3157.29,2037.5 3142.29,2030 3142.29,2020
  region net PW: 3032.5,1951.69 3007.5,1951.69 3015,1950 3025,1950
  region net PW: 3057.05,1762.75 3069.33,1784.53 3058.54,1788.14 3052.45,1780.08
  region net KEY2_1: 3284.06,1946.69 3262.29,1958.98 3255.87,1945.37 3264.91,1940.27
  region net +3.3V: 3037.71,2037.5 3037.71,2012.5 3052.71,2020 3052.71,2030
  region net +3.3V: 3082.06,2016 3082.06,2034 3073.66,2030 3073.66,2020
  region net +3.3V: 3002.29,2010.06 3002.29,2035.06 2987.29,2027.56 2987.29,2017.56
  region net +3.3V: 2900.75,1980.16 2900.75,1960.47 2915.75,1965.32 2915.75,1975.32
  region net +3.3V: 2897.5,1960.47 2872.5,1960.47 2880,1955 2890,1955
  region net +3.3V: 2465.75,2279.53 2465.75,2259.85 2480.75,2264.82 2480.75,2274.82
  region net M_RST: 3549.06,2001.81 3527.29,2014.1 3520.87,2000.49 3529.91,1995.39
  region net Q1_3: 3527.58,3070.85 3516.56,3018.86 3496.22,3042.5 3499.4,3057.5
  region net Q1_3: 3333.8,3063.78 3333.8,3036.22 3356.3,3042.5 3356.3,3057.5
  region net Q4_3: 2031.19,2446.22 2031.19,2473.75 2008.69,2462.5 2008.69,2447.5
  region net Q4_3: 2012.94,2446 2012.94,2464 2021.34,2462.5 2021.34,2447.5
  region net +5V: 2332.7,2041.7 2297.3,2041.7 2307.5,2019.2 2322.5,2019.2
  region net +5V: 2306,2007.94 2324,2007.94 2322.5,2016.34 2307.5,2016.34
  region net +3.3V: 3015.75,2919.53 3015.75,2899.84 3038.25,2902.19 3038.25,2917.19
  region net +3.3V: 3119.25,2899.84 3119.25,2919.53 3096.75,2917.19 3096.75,2902.19
  region net +3.3V: 2984.25,2899.84 2984.25,2919.53 2961.75,2917.19 2961.75,2902.19
  region net +3.3V: 2880.75,2880.15 2880.75,2860.47 2900.32,2862.81 2900.32,2877.81
  region net +3.3V: 2849.25,2860.47 2849.25,2880.15 2826.75,2877.81 2826.75,2862.81
  region net +3.3V: 2714.19,2847.29 2711.5,2865.09 2720.02,2864.94 2722.29,2849.94
  region net +3.3V: 2747.29,2841.69 2747.29,2873.19 2724.79,2864.94 2724.79,2849.94
  region net +3.3V: 2441,2337.06 2459,2337.06 2457.5,2328.66 2442.5,2328.66
  region net +3.3V: 2434.26,2279.53 2465.75,2279.53 2457.5,2302.03 2442.5,2302.03
  region net +3.3V: 2434.26,2259.85 2434.26,2279.53 2411.76,2277.19 2411.76,2262.19
  region net +3.3V: 2123.9,2301.31 2123.9,2263.81 2146.4,2275.06 2146.4,2290.06
  region net +3.3V: 2302.28,2266.81 2302.28,2298.31 2279.78,2290.06 2279.78,2275.06
  region net +3.3V: 2036.25,2096.3 2073.75,2096.3 2062.5,2118.8 2047.5,2118.8
  region net +3.3V: 2073.75,2253.7 2036.25,2253.7 2047.5,2231.2 2062.5,2231.2
  region net +5V: 2297.3,2041.7 2297.3,2071.75 2274.8,2060.5 2274.8,2045.5
  region net +5V: 2167.2,2071.75 2167.2,2034.25 2189.7,2045.5 2189.7,2060.5
  region net +5V: 2332.7,2073.2 2332.7,2041.7 2355.2,2049.94 2355.2,2064.94
  region net +5V: 2465.7,2075.2 2465.7,2055.5 2488.2,2057.81 2488.2,2072.81
  region net +5V: 2606.65,1803.44 2583.46,1773.97 2572.7,1796.69 2582.05,1808.56
  region net USB1_1: 2521.06,1804.68 2528.94,1804.68 2532.5,1827.18 2517.5,1827.18
Bottom Layer:
  pour cut-out: 3377.5,2765 3377.5,2125 3652.5,2125 3652.5,2765
  region net +5V: 1750.16,2762.1 1750.16,2807.1 1739.6,2792.1 1739.6,2777.1
  region net RP1_2: 1768.12,2854.66 1799.94,2886.48 1804.18,2861.03 1793.58,2850.42
  region net M_SRX: 3035.75,3228.02 3023.02,3240.75 3021.46,3233.54 3028.54,3226.46
  region net M_SRX: 3016,2837.94 3034,2837.94 3030,2846.34 3020,2846.34
  region net M_SRX: 3026,3342.94 3044,3342.94 3040,3351.34 3030,3351.34
  region net M_SRX: 3059.06,3581.94 3091.94,3549.06 3063.69,3546.62 3056.62,3553.69
  region net M_STX: 3178.8,3551.09 3162.72,3594.72 3148.5,3570.57 3152.31,3560.23
  region net M_STX: 2941,2837.94 2959,2837.94 2955,2846.34 2945,2846.34
  region net W_RX1: 2671,3017.94 2689,3017.94 2685,3026.34 2675,3026.34
  region net W_RX1: 2926,3417.06 2944,3417.06 2940,3408.66 2930,3408.66
  region net W_TX1: 2696,2942.94 2714,2942.94 2710,2951.34 2700,2951.34
  region net W_TX1: 2996.14,3414.69 2979,3420.2 2980,3411.05 2990,3407.84
  region net M_TX: 3311.98,3195.75 3299.25,3183.02 3308.02,3179.91 3315.09,3186.98
  region net M_TX: 3311,2217.94 3329,2217.94 3325,2226.34 3315,2226.34
  region net M_RX: 3245.75,3168.02 3233.02,3180.75 3231.46,3173.54 3238.54,3166.46
  region net M_RX: 3226,2217.94 3244,2217.94 3240,2226.34 3230,2226.34
  region net M_TX: 2836,3422.06 2854,3422.06 2850,3413.66 2840,3413.66
  region net M_TX: 2836,3322.94 2854,3322.94 2850,3331.34 2840,3331.34
  region net M_RX: 2796,3432.06 2814,3432.06 2810,3423.66 2800,3423.66
  region net M_RX: 2796,3282.94 2814,3282.94 2810,3291.34 2800,3291.34
  region net XZ: 3180.75,3128.02 3168.02,3140.75 3164.91,3131.98 3171.98,3124.91
  region net XZ: 3016.98,2209.25 3004.25,2221.98 3013.02,2225.09 3020.09,2218.02
  region net LED: 2896,2837.94 2914,2837.94 2910,2846.34 2900,2846.34
  region net LED: 2896,2922.06 2914,2922.06 2910,2913.66 2900,2913.66
  region net +3.3V: 3431,3077.06 3449,3077.06 3447.5,3068.66 3432.5,3068.66
  region net +3.3V: 3431,2992.94 3449,2992.94 3447.5,3001.34 3432.5,3001.34
  region net DIN: 3186,2657.94 3204,2657.94 3202.5,2666.34 3187.5,2666.34
  region net DIN: 3205.75,2848.02 3193.02,2860.75 3189.7,2855.3 3200.3,2844.7
  region net +3.3V: 1796,2197.06 1814,2197.06 1812.5,2188.66 1797.5,2188.66
  region net +3.3V: 1796,2132.94 1814,2132.94 1812.5,2141.34 1797.5,2141.34
  region net +3.3V: 3387.06,1866 3387.06,1884 3378.66,1880 3378.66,1870
  region net +3.3V: 3102.94,1866 3102.94,1884 3111.34,1880 3111.34,1870
  region net Q4_3: 1999.65,2444.26 1995.01,2461.65 1987.21,2458.29 1991.21,2443.29
  region net Q4_3: 1813.44,2424.22 1813.44,2477.37 1838.24,2458.29 1838.24,2443.29
  region net RP1_2: 1824.36,2557.87 1777.11,2582.21 1805.09,2595.7 1819.09,2588.49
  region net +5V: 2315.75,2011.98 2303.02,1999.25 2298.14,2006.25 2308.75,2016.86
  region net +5V: 3359.14,3130.47 3376.12,3124.51 3378.26,3132.66 3362.56,3138.17
  region net +5V: 3525.4,3167.95 3518.16,3115.29 3496.18,3137.5 3498.24,3152.5
  region net +5V: 3356,3112.06 3374,3112.06 3372.5,3103.66 3357.5,3103.66
  region net +5V: 2306,1992.06 2324,1992.06 2322.5,1983.66 2307.5,1983.66
  region net +3.3V: 2696,2847.06 2714,2847.06 2712.5,2838.66 2697.5,2838.66
  region net +3.3V: 2446.67,2356.53 2461.86,2346.86 2465.26,2354.65 2452.3,2362.91

## Silkscreen, mask and mechanical layers (free items; w line width, h text height)
Top Overlay:
  lines w6 net S$2701: 2760,3275 2765,3270 3480,3270 3485,3275 3485,3405 3480,3410 2765,3410 2760,3400 2760,3275
  lines w6 net S$2703: 2760,3347.31 3480,3347.31 3485,3342.31
  lines w6 net S$2705: 2872.96,3410 2875.96,3407 2875.96,3270
  lines w6 net S$2707: 3011.7,3410 3012.2,3270
  lines w6 net S$2709: 3144.69,3410 3145.69,3409 3145.69,3270
  lines w6 net S$2711: 3279.69,3410 3280.11,3410 3280,3402.19 3280,3275
  lines w6 net S$2713: 3368.44,3410 3369.44,3409 3369.44,3270
  text "M_RX  W_RX1 M_sRX M_sTX   XZ    +3.3V / M_TX  W_TX1 W_TX0 W_RX0 GND GND" at 2765,3365 h45
  text "WS2812(5V GND DIN)" at 3340,3235 h45 r270
  text "电机调压" at 1710,2655 h45
  text "N20电机(-  +)" at 1980,2385 h45 r90
  text "幻彩灯" at 2300,2370 h80
  text "GND" at 1695,2205 h45 r1
  text "供电预留" at 1810,2125 h45 r90
  text "+5V" at 1695,2105 h45
  text "配网指示灯" at 3355,2070 h45

## Text inside footprints (layer, text, board x,y; h text height)
TXD1: Document "不给布线！！挖空区" at 1920.67,3492.44 h80
U2: Top Overlay "ESP12F" at 3000,2620 h80 r270